# Altium PCB AudRevA.PcbDoc
Units mil, origin at the board's own origin, x right, y up, seen from the top; angles counter-clockwise.
Board outline 2370 x 1710 mil, 2 copper layers (Top Layer, Bottom Layer); 133 components, 62 nets, 319 pads, 116 vias.
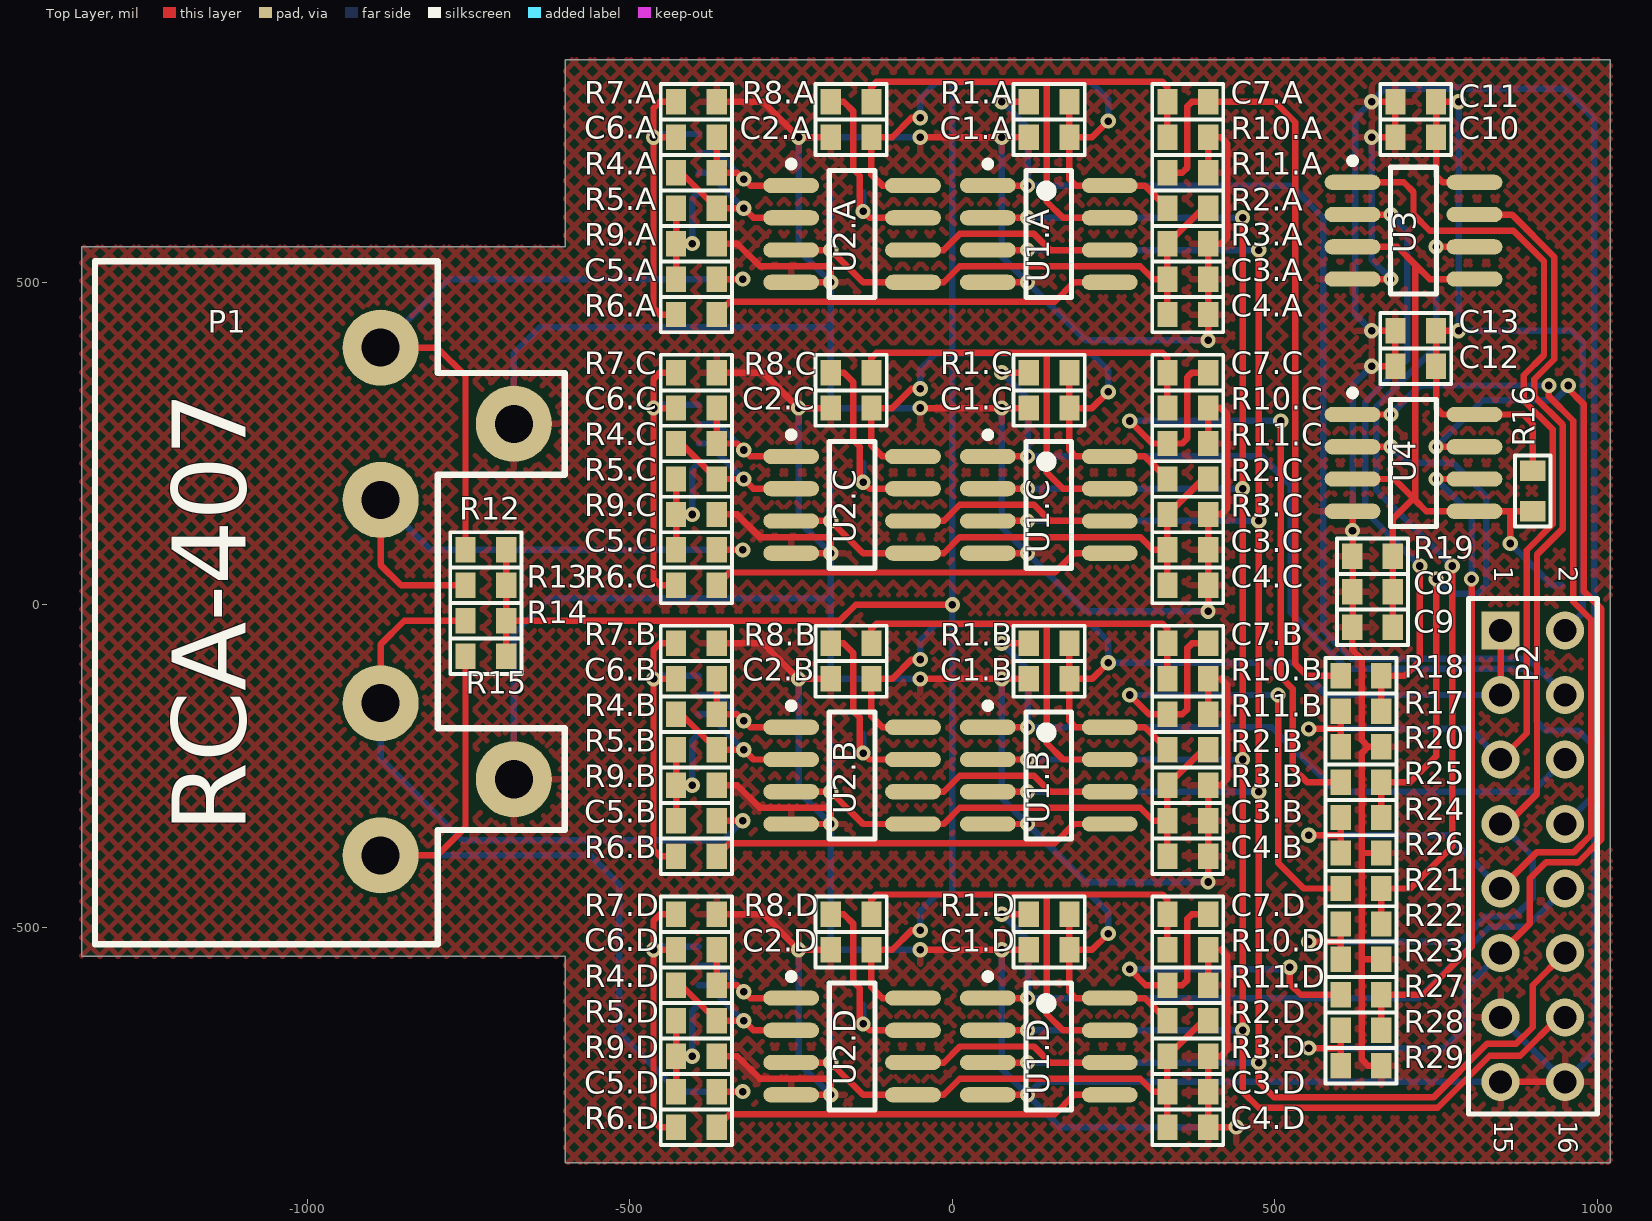
[diagram p0: Top Layer view]
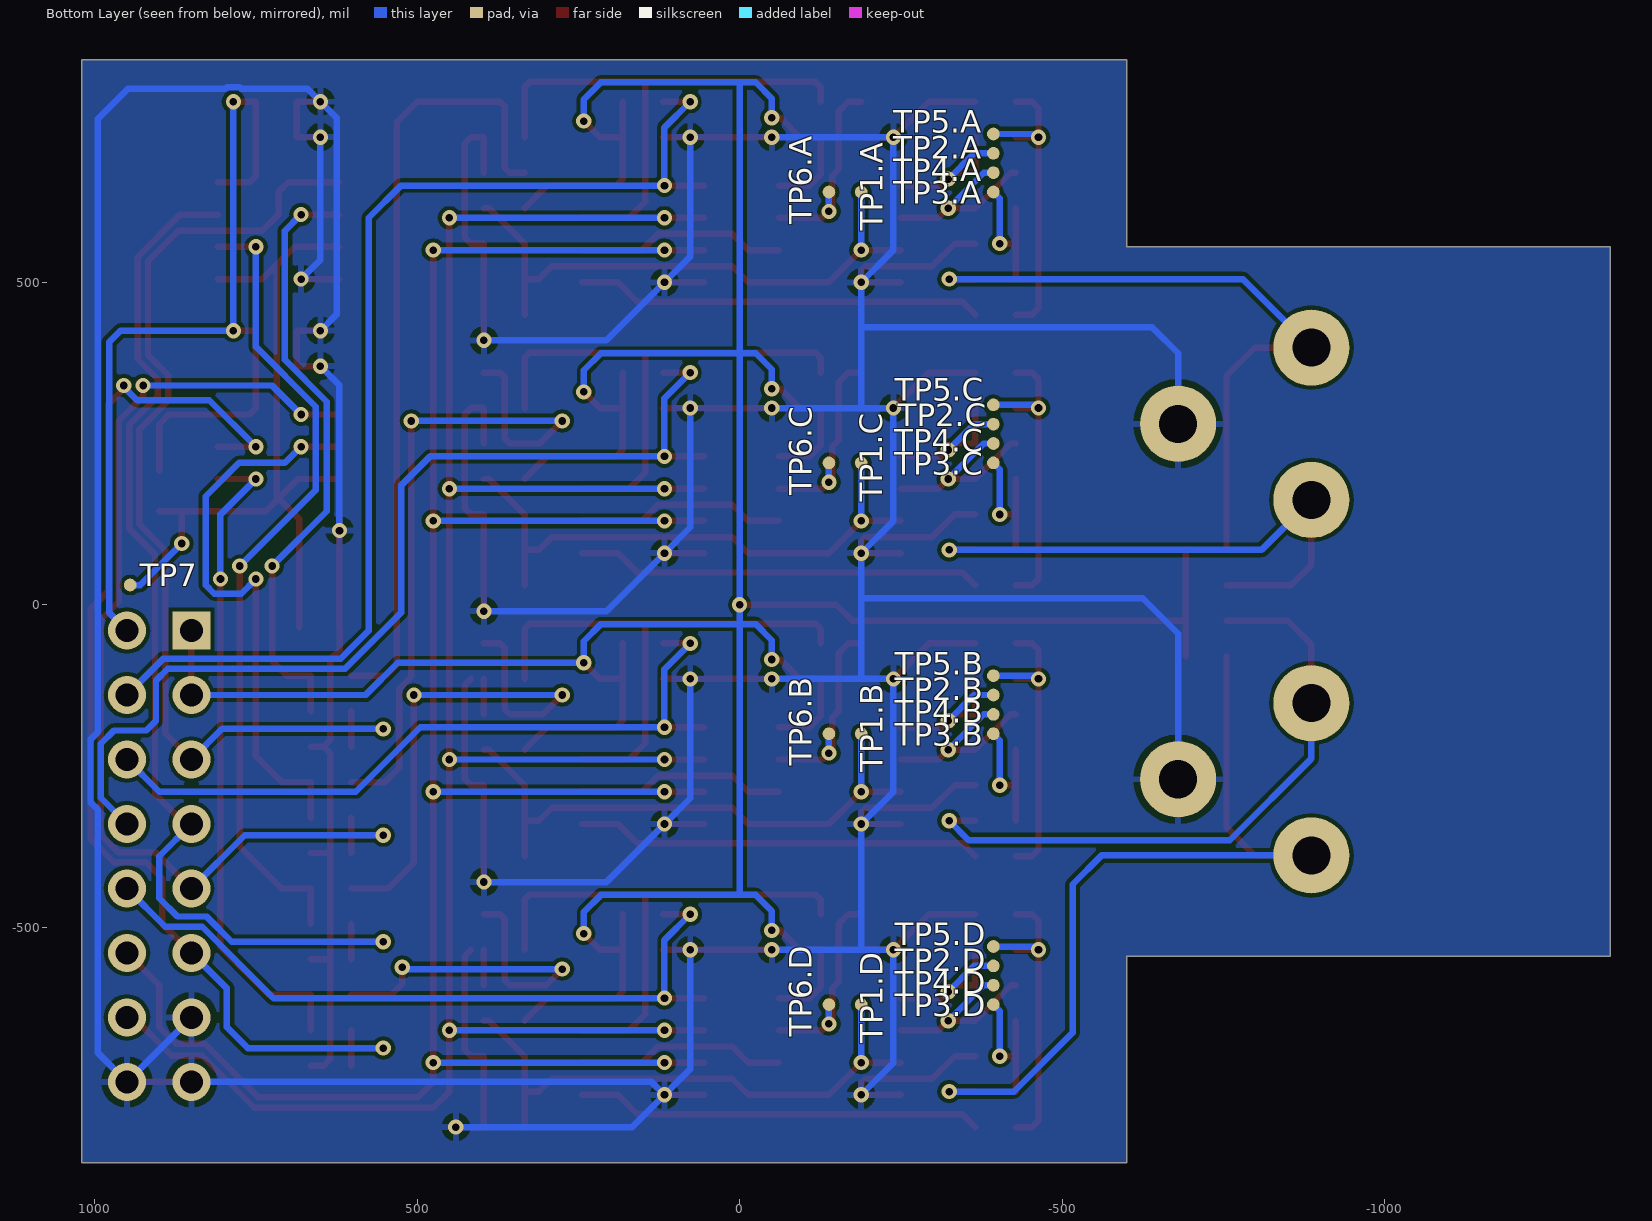
[diagram p1: Bottom Layer view, seen from below]

## Layer stack, top to bottom
Top Solder: solder mask 0.4, Solder Resist, Dk 3.5
Top Layer: signal copper 1.4
Dielectric 1: dielectric 12.6, FR-4, Dk 4.8
Bottom Layer: signal copper 1.4
Bottom Solder: solder mask 0.4, Solder Resist, Dk 3.5

## Board outline
-1350,-545 -1350,555 -600,555 -600,845 1020,845 1020,-865 -600,-865 -600,-545

## Design rules (kind name [scope] priority, off if disabled: settings)
Clearance [All] p1: gap=6 ignorepadtopadclearanceinfootprint=FALSE except(0: Arc-Hole Track-Hole SMDPad-Hole THPad-Hole Via-Hole Fill-Hole Poly-Hole Region-Hole Text-Hole)
ComponentClearance ComponentClearance_1 [InComponent('X1') vs InComponent('X2')] p1: gap=0 collisioncheckmode=3 verticalgap=0 showdistances=FALSE
ComponentClearance [All] p2: gap=10 collisioncheckmode=3 verticalgap=10 showdistances=FALSE
DiffPairsRouting [All] p1: maxlimit=10 minlimit=3.94 mostfreqgap=10 toplayer_minwidth=3.94 toplayer_maxwidth=15 toplayer_prefwidth=15 bottomlayer_minwidth=3.94 bottomlayer_maxwidth=15 bottomlayer_prefwidth=15 maxuncoupledlength=500
Height Height_1 [InComponent('P1')] p1: minheight=0 maxheight=10000 prefheight=500
Height [All] p2: minheight=0 maxheight=1000 prefheight=500
HoleSize [All] p1: absolutevalues=TRUE maxlimit=137.8 minlimit=7.87 maxpercent=80.000 minpercent=20.000
MatchedLengths [(InNetClass('UART1') OR InNetClass('UART2'))] p1: tolerance=19.68 checknetsindiffpair=FALSE checkdiffpairvsdiffpair=TRUE checkxsignals=TRUE checkothers=TRUE
MinimumSolderMaskSliver [All] p1: minsoldermaskwidth=1.77
PasteMaskExpansion [All] p1: expansion=3.94
PolygonConnect PolygonConnect_2 [All vs OnLayer('VCC')] p1: connectstyle=Direct reliefconductorwidth=10 reliefentries=4 polygonreliefangle="90 Angle" airgapwidth=10
PolygonConnect PolygonConnect_1 [All] p2: connectstyle=Relief reliefconductorwidth=10 reliefentries=4 polygonreliefangle="90 Angle" airgapwidth=10
PolygonConnect [All vs OnLayer('GND')] p3: connectstyle=Direct reliefconductorwidth=10 reliefentries=4 polygonreliefangle="90 Angle" airgapwidth=10
RoomDefinition ChD [InComponentClass('ChD')] p1: confinementstyle=ConfineIn formatcopy=TRUE lockcomponents=FALSE outline -568.5,-845 561.5,-845 561.5,-425 -568.5,-425
RoomDefinition ChC [InComponentClass('ChC')] p2: confinementstyle=ConfineIn formatcopy=TRUE lockcomponents=FALSE outline -568.5,-5 561.5,-5 561.5,415 -568.5,415
RoomDefinition ChB [InComponentClass('ChB')] p3: confinementstyle=ConfineIn formatcopy=TRUE lockcomponents=FALSE outline -568.5,-425 561.5,-425 561.5,-5 -568.5,-5
RoomDefinition ChA [InComponentClass('ChA')] p4: confinementstyle=ConfineIn formatcopy=TRUE lockcomponents=FALSE outline -568.5,415 561.5,415 561.5,835 -568.5,835
RoutingTopology [All] p1: topology=Daisy_Simple
RoutingVias [All] p1: holewidth=11.81 width=23.62 viastyle="Through Hole" minholewidth=7.87 minwidth=19.68 maxholewidth=19.68 maxwidth=39.37
SilkToSilkClearance [All] p1: silktosilkclearance=3.94
SilkToSolderMaskClearance [IsPad] p1: minsilkscreentomaskgap=3.94 clearancetoexposedcopper=TRUE
SolderMaskExpansion [All] p1: expansion=4
Width [All] p1: maxlimit=59.06 minlimit=3.94 preferedwidth=10 minimp=50.000000 maximp=50.000000 favimp=50.000000
21 further rules are at their usual default settings.

## Classes and differential pairs
component class ChA: C1.A C2.A C3.A C4.A C5.A C6.A C7.A R1.A R2.A R3.A R4.A R5.A R6.A R7.A R8.A R9.A R10.A R11.A TP1.A TP2.A TP3.A TP4.A TP5.A TP6.A U1.A U2.A
component class ChB: C1.B C2.B C3.B C4.B C5.B C6.B C7.B R1.B R2.B R3.B R4.B R5.B R6.B R7.B R8.B R9.B R10.B R11.B TP1.B TP2.B TP3.B TP4.B TP5.B TP6.B U1.B U2.B
component class ChC: C1.C C2.C C3.C C4.C C5.C C6.C C7.C R1.C R2.C R3.C R4.C R5.C R6.C R7.C R8.C R9.C R10.C R11.C TP1.C TP2.C TP3.C TP4.C TP5.C TP6.C U1.C U2.C
component class ChD: C1.D C2.D C3.D C4.D C5.D C6.D C7.D R1.D R2.D R3.D R4.D R5.D R6.D R7.D R8.D R9.D R10.D R11.D TP1.D TP2.D TP3.D TP4.D TP5.D TP6.D U1.D U2.D
component class Input: C8 C9 C10 C11 C12 C13 P1 P2 R12 R13 R14 R15 R16 R17 R18 R19 R20 R21 R22 R23 R24 R25 R26 R27 R28 R29 TP7 U3 U4
channel class Chanal: ChA ChB ChC ChD

## Components (designator, comment, footprint, x,y, rotation, side; value= is the part's Value field where it differs from the comment)
C1.A "0.1uF" "SMD 0603" 181.5,725 r180 top (schematic designator C1)
C1.B "0.1uF" "SMD 0603" 181.5,-115 r180 top (schematic designator C1)
C1.C "0.1uF" "SMD 0603" 181.5,305 r180 top (schematic designator C1)
C1.D "0.1uF" "SMD 0603" 181.5,-535 r180 top (schematic designator C1)
C2.A "0.1uF" "SMD 0603" -125.51,725 r180 top (schematic designator C2)
C2.B "0.1uF" "SMD 0603" -125.51,-115 r180 top (schematic designator C2)
C2.C "0.1uF" "SMD 0603" -125.51,305 r180 top (schematic designator C2)
C2.D "0.1uF" "SMD 0603" -125.51,-535 r180 top (schematic designator C2)
C3.A "0.1uF" "SMD 0603" 333.5,505 r0 top (schematic designator C3)
C3.B "0.1uF" "SMD 0603" 333.5,-335 r0 top (schematic designator C3)
C3.C "0.1uF" "SMD 0603" 333.5,85 r0 top (schematic designator C3)
C3.D "0.1uF" "SMD 0603" 333.5,-755 r0 top (schematic designator C3)
C4.A "0.01uF" "SMD 0603" 333.5,450 r0 top (schematic designator C4)
C4.B "0.01uF" "SMD 0603" 333.5,-390 r0 top (schematic designator C4)
C4.C "0.01uF" "SMD 0603" 333.5,30 r0 top (schematic designator C4)
C4.D "0.01uF" "SMD 0603" 333.5,-810 r0 top (schematic designator C4)
C5.A "0.1uF" "SMD 0603" -365.51,505 r180 top (schematic designator C5)
C5.B "0.1uF" "SMD 0603" -365.51,-335 r180 top (schematic designator C5)
C5.C "0.1uF" "SMD 0603" -365.51,85 r180 top (schematic designator C5)
C5.D "0.1uF" "SMD 0603" -365.51,-755 r180 top (schematic designator C5)
C6.A "0.1uF" "SMD 0603" -365.51,725 r180 top (schematic designator C6)
C6.B "0.1uF" "SMD 0603" -365.51,-115 r180 top (schematic designator C6)
C6.C "0.1uF" "SMD 0603" -365.51,305 r180 top (schematic designator C6)
C6.D "0.1uF" "SMD 0603" -365.51,-535 r180 top (schematic designator C6)
C7.A "0.1uF" "SMD 0603" 333.5,780 r0 top (schematic designator C7)
C7.B "0.1uF" "SMD 0603" 333.5,-60 r0 top (schematic designator C7)
C7.C "0.1uF" "SMD 0603" 333.5,360 r0 top (schematic designator C7)
C7.D "0.1uF" "SMD 0603" 333.5,-480 r0 top (schematic designator C7)
C8 "0.1uF" "SMD 0603" 682.99,20 r180 top
C9 "0.01uF" "SMD 0603" 682.99,-35 r180 top
C10 "0.1uF" "SMD 0603" 750,725 r180 top
C11 "0.1uF" "SMD 0603" 750,780 r180 top
C12 "0.1uF" "SMD 0603" 750,370 r180 top
C13 "0.1uF" "SMD 0603" 750,425 r180 top
P1 "RCA-407" RCA4 -680,5 r90 top
P2 "Header 8X2" HDR2X8 850,-40 r270 top
R1.A "10k" "SMD 0603" 118.5,780 r0 top (schematic designator R1)
R1.B "10k" "SMD 0603" 118.5,-60 r0 top (schematic designator R1)
R1.C "10k" "SMD 0603" 118.5,360 r0 top (schematic designator R1)
R1.D "10k" "SMD 0603" 118.5,-480 r0 top (schematic designator R1)
R2.A "10k" "SMD 0603" 396.5,615 r180 top (schematic designator R2)
R2.B "10k" "SMD 0603" 396.5,-225 r180 top (schematic designator R2)
R2.C "10k" "SMD 0603" 396.5,195 r180 top (schematic designator R2)
R2.D "10k" "SMD 0603" 396.5,-645 r180 top (schematic designator R2)
R3.A "10k" "SMD 0603" 396.5,560 r180 top (schematic designator R3)
R3.B "10k" "SMD 0603" 396.5,-280 r180 top (schematic designator R3)
R3.C "10k" "SMD 0603" 396.5,140 r180 top (schematic designator R3)
R3.D "10k" "SMD 0603" 396.5,-700 r180 top (schematic designator R3)
R4.A "50k" "SMD 0603" -365.51,670 r180 top (schematic designator R4)
R4.B "50k" "SMD 0603" -365.51,-170 r180 top (schematic designator R4)
R4.C "50k" "SMD 0603" -365.51,250 r180 top (schematic designator R4)
R4.D "50k" "SMD 0603" -365.51,-590 r180 top (schematic designator R4)
R5.A "1k" "SMD 0603" -365.51,615 r180 top (schematic designator R5)
R5.B "1k" "SMD 0603" -365.51,-225 r180 top (schematic designator R5)
R5.C "1k" "SMD 0603" -365.51,195 r180 top (schematic designator R5)
R5.D "1k" "SMD 0603" -365.51,-645 r180 top (schematic designator R5)
R6.A "10k" "SMD 0603" -365.51,450 r180 top (schematic designator R6)
R6.B "10k" "SMD 0603" -365.51,-390 r180 top (schematic designator R6)
R6.C "10k" "SMD 0603" -365.51,30 r180 top (schematic designator R6)
R6.D "10k" "SMD 0603" -365.51,-810 r180 top (schematic designator R6)
R7.A "100k" "SMD 0603" -428.5,780 r0 top (schematic designator R7)
R7.B "100k" "SMD 0603" -428.5,-60 r0 top (schematic designator R7)
R7.C "100k" "SMD 0603" -428.5,360 r0 top (schematic designator R7)
R7.D "100k" "SMD 0603" -428.5,-480 r0 top (schematic designator R7)
R8.A "10k" "SMD 0603" -125.51,780 r180 top (schematic designator R8)
R8.B "10k" "SMD 0603" -125.51,-60 r180 top (schematic designator R8)
R8.C "10k" "SMD 0603" -125.51,360 r180 top (schematic designator R8)
R8.D "10k" "SMD 0603" -125.51,-480 r180 top (schematic designator R8)
R9.A "100k" "SMD 0603" -428.5,560 r0 top (schematic designator R9)
R9.B "100k" "SMD 0603" -428.5,-280 r0 top (schematic designator R9)
R9.C "100k" "SMD 0603" -428.5,140 r0 top (schematic designator R9)
R9.D "100k" "SMD 0603" -428.5,-700 r0 top (schematic designator R9)
R10.A "1M" "SMD 0603" 333.5,725 r0 top (schematic designator R10)
R10.B "1M" "SMD 0603" 333.5,-115 r0 top (schematic designator R10)
R10.C "1M" "SMD 0603" 333.5,305 r0 top (schematic designator R10)
R10.D "1M" "SMD 0603" 333.5,-535 r0 top (schematic designator R10)
R11.A "100k" "SMD 0603" 333.5,670 r0 top (schematic designator R11)
R11.B "100k" "SMD 0603" 333.5,-170 r0 top (schematic designator R11)
R11.C "100k" "SMD 0603" 333.5,250 r0 top (schematic designator R11)
R11.D "100k" "SMD 0603" 333.5,-590 r0 top (schematic designator R11)
R12 "10k" "SMD 0603" -755,85 r0 top
R13 "10k" "SMD 0603" -755,30 r0 top
R14 "10k" "SMD 0603" -755,-25 r0 top
R15 "10k" "SMD 0603" -755,-80 r0 top
R16 "10k" "SMD 0603" 900,145 r90 top
R17 "10k" "SMD 0603" 665,-165 r180 top
R18 "10k" "SMD 0603" 665,-110 r180 top
R19 "10k" "SMD 0603" 620,75 r0 top
R20 "1M" "SMD 0603" 602.01,-220 r0 top
R21 "10k" "SMD 0603" 665,-440 r180 top
R22 "10k" "SMD 0603" 665,-495 r180 top
R23 "1M" "SMD 0603" 602.01,-550 r0 top
R24 "10k" "SMD 0603" 665,-330 r180 top
R25 "10k" "SMD 0603" 665,-275 r180 top
R26 "1M" "SMD 0603" 602.01,-385 r0 top
R27 "10k" "SMD 0603" 665,-605 r180 top
R28 "10k" "SMD 0603" 665,-660 r180 top
R29 "1M" "SMD 0603" 602.01,-715 r0 top
TP1.A "testPoint" TESTPOINT -188.5,640 r90 bottom (schematic designator TP1)
TP1.B "testPoint" TESTPOINT -188.5,-200 r90 bottom (schematic designator TP1)
TP1.C "testPoint" TESTPOINT -188.5,220 r90 bottom (schematic designator TP1)
TP1.D "testPoint" TESTPOINT -188.5,-620 r90 bottom (schematic designator TP1)
TP2.A "testPoint" TESTPOINT -393.5,700 r90 bottom (schematic designator TP2)
TP2.B "testPoint" TESTPOINT -393.5,-140 r90 bottom (schematic designator TP2)
TP2.C "testPoint" TESTPOINT -393.5,280 r90 bottom (schematic designator TP2)
TP2.D "testPoint" TESTPOINT -393.5,-560 r90 bottom (schematic designator TP2)
TP3.A "testPoint" TESTPOINT -393.5,640 r90 bottom (schematic designator TP3)
TP3.B "testPoint" TESTPOINT -393.5,-200 r90 bottom (schematic designator TP3)
TP3.C "testPoint" TESTPOINT -393.5,220 r90 bottom (schematic designator TP3)
TP3.D "testPoint" TESTPOINT -393.5,-620 r90 bottom (schematic designator TP3)
TP4.A "testPoint" TESTPOINT -393.5,670 r90 bottom (schematic designator TP4)
TP4.B "testPoint" TESTPOINT -393.5,-170 r90 bottom (schematic designator TP4)
TP4.C "testPoint" TESTPOINT -393.5,250 r90 bottom (schematic designator TP4)
TP4.D "testPoint" TESTPOINT -393.5,-590 r90 bottom (schematic designator TP4)
TP5.A "testPoint" TESTPOINT -393.5,730 r90 bottom (schematic designator TP5)
TP5.B "testPoint" TESTPOINT -393.5,-110 r90 bottom (schematic designator TP5)
TP5.C "testPoint" TESTPOINT -393.5,310 r90 bottom (schematic designator TP5)
TP5.D "testPoint" TESTPOINT -393.5,-530 r90 bottom (schematic designator TP5)
TP6.A "testPoint" TESTPOINT -138.5,640 r90 bottom (schematic designator TP6)
TP6.B "testPoint" TESTPOINT -138.5,-200 r90 bottom (schematic designator TP6)
TP6.C "testPoint" TESTPOINT -138.5,220 r90 bottom (schematic designator TP6)
TP6.D "testPoint" TESTPOINT -138.5,-620 r90 bottom (schematic designator TP6)
TP7 "testPoint" TESTPOINT 945,30.55 r90 bottom
U1.A "MCP41010-I/SN" SOIC-SN8_N 149.5,575 r0 top (schematic designator U1)
U1.B "MCP41010-I/SN" SOIC-SN8_N 149.5,-265 r0 top (schematic designator U1)
U1.C "MCP41010-I/SN" SOIC-SN8_N 149.5,155 r0 top (schematic designator U1)
U1.D "MCP41010-I/SN" SOIC-SN8_N 149.5,-685 r0 top (schematic designator U1)
U2.A "LM358D" 751-02_N -155.51,575 r0 top (schematic designator U2)
U2.B "LM358D" 751-02_N -155.51,-265 r0 top (schematic designator U2)
U2.C "LM358D" 751-02_N -155.51,155 r0 top (schematic designator U2)
U2.D "LM358D" 751-02_N -155.51,-685 r0 top (schematic designator U2)
U3 "LM358D" 751-02_N 715,580 r0 top
U4 "LM358D" 751-02_N 715,220 r0 top

## Footprints (in the part's own frame and the unit in brackets; to place one, negate y for a bottom-side part, rotate by r counter-clockwise, add the part's x,y. Pads: shape width x height; smd on the part's side, far side on the other; paste and mask are expansions set on the pad)
751-02_N [mm] "SOIC, 8-Leads, Body 4.9x3.9mm, Pitch 1.27mm, IPC Medium Density"
  oval 2.2x0.6 smd: 1(-2.4,1.905) 2(-2.4,0.635) 3(-2.4,-0.635) 4(-2.4,-1.905) 5(2.4,-1.905) 6(2.4,-0.635) 7(2.4,0.635) 8(2.4,1.905)
  silkscreen extent -2.52,-2.5 0.9,2.88, body extent -1.95,-2.45 1.95,2.45, height 1.75
HDR2X8 [mm] "Connector; Header; 8x2 Position"
  rect 1.5x1.5 hole 0.9: 1(0,0)
  round 1.5 hole 0.9: 2(0,2.54) 3(2.54,0) 4(2.54,2.54) 5(5.08,0) 6(5.08,2.54) 7(7.62,0) 8(7.62,2.54) 9(10.16,0) 10(10.16,2.54) 11(12.7,0) 12(12.7,2.54) 13(15.24,0) 14(15.24,2.54) 15(17.78,0) 16(17.78,2.54)
  silkscreen extent -1.27,-1.27 19.05,3.81
RCA4 [mm]
  round 3 hole 1.5: 1(10,5.25) 2(4,5.25) 3(-4,5.25) 4(-10,5.25) 5(7,0) 6(-7,0)
  silkscreen extent -13.5,-2 13.4,16.5, body extent -13.77,-0.6 13.72,24.3, height 27
"SMD 0603" [mm]
  rect 0.8x1 smd: 1(0,0) 2(1.6,0)
  silkscreen extent -0.6,-0.7 2.2,0.7, body extent -0.03,-0.45 1.63,0.45, height 0.46
SOIC-SN8_N [mm] "SOIC, 8-Leads, Body 4.9x3.8mm, Pitch 1.27mm, IPC Medium Density"
  oval 2.2x0.6 smd: 1(-2.4,1.905) 2(-2.4,0.635) 3(-2.4,-0.635) 4(-2.4,-1.905) 5(2.4,-1.905) 6(2.4,-0.635) 7(2.4,0.635) 8(2.4,1.905)
  silkscreen extent -2.52,-2.5 0.9,2.88, body extent -2,-2.5 2,2.5, height 1.75
TESTPOINT [mm] "testpoint"
  round 0.5 smd paste+0 mask+0: 0(0,0)

## Part data
C1.A C1.B C1.C C1.D C2.A C2.B C2.C C2.D C3.A C3.B C3.C C3.D C4.A C4.B C4.C C4.D C5.A C5.B C5.C C5.D C6.A C6.B C6.C C6.D C7.A C7.B C7.C C7.D C8 C9 C10 C11 C12 C13: library part Capasitor
P1: "RCA 2x2"
P2: "Header, 8-Pin, Dual row", LatestRevisionDate=17-Jul-2002, LatestRevisionNote="Re-released for DXP Platform.", Publisher="Altium Limited"
R1.A R1.B R1.C R1.D R2.A R2.B R2.C R2.D R3.A R3.B R3.C R3.D R4.A R4.B R4.C R4.D R5.A R5.B R5.C R5.D R6.A R6.B R6.C R6.D R7.A R7.B R7.C R7.D R8.A R8.B R8.C R8.D R9.A R9.B R9.C R9.D R10.A R10.B R10.C R10.D R11.A R11.B R11.C R11.D R12 R13 R14 R15 R16 R17 R18 R19 R20 R21 R22 R23 R24 R25 R26 R27 R28 R29: library part Resistor
TP1.A TP1.B TP1.C TP1.D TP2.A TP2.B TP2.C TP2.D TP3.A TP3.B TP3.C TP3.D TP4.A TP4.B TP4.C TP4.D TP5.A TP5.B TP5.C TP5.D TP6.A TP6.B TP6.C TP6.D TP7: library part TestPoint
U1.A U1.B U1.C U1.D: "Single/Dual Digital Potentiometer with SPI Interface, 8-Pin SOIC 150mil, Industrial Temperature", Manufacturer=Microchip, Supplier Part Number 1=MCP41010-I/SN-ND, Code_IPC=SOIC127P600-8, Code_JEDEC=MS-012, ComponentLink1Description="Manufacturer URL", ComponentLink1URL=http://www.microchip.com/, ComponentLink2Description=Datasheet, ComponentLink2URL=http://ww1.microchip.com/downloads/en/DeviceDoc/11195c.pdf, ComponentLink3Description="Package Specification", ComponentLink3URL=http://www.microchip.com/stellent/groups/techpub_sg/documents/packagingspec/en012702.pdf, DatasheetVersion=Jul-2003, Mounting Technology="Surface Mount", PackageDescription="8-Lead Plastic Small Outline (SN) - Narrow, 3.90mm Body [SOIC]", PackageReference=SOIC-SN8, PackageVersion="revBB, Aug-2009", PartNumber=MCP41010-I/SN, Supplier 1=Digi-Key, Supplier 2=Farnell, Supplier 3=Newark, Supplier 4=Mouser, Supplier Part Number 2=9758607, Supplier Part Number 3=61K2949, Supplier Part Number 4=579-MCP41010-I/SN
U2.A U2.B U2.C U2.D U3 U4: "Dual Low-Power Operational Amplifier", Code_IPC=SOIC127P600-8, Code_JEDEC=MS-012-AA, ComponentLink1Description="Manufacturer Link", ComponentLink1URL=http://www.onsemi.com/site/products/parametrics/0,4446,251,00.html, ComponentLink2Description=Datasheet, ComponentLink2URL=http://www.onsemi.com/pub/Collateral/LM358-D.PDF, DatasheetVersion=1988, LatestRevisionDate=13-Apr-2006, LatestRevisionNote="IPC-7351 Footprint Added.", PackageDescription="8-Pin Small Outline Integrated Circuit 1.27 mm Pitch", PackageReference=751-02, Published=17-Jul-2002, Publisher="Altium Limited"

## Via types
v1: diameter 23.62, hole 11.81, Top Layer to Bottom Layer, tented both sides, 116 vias

## Nets (pads, with @x,y where several pads share a name; then routed paths per layer and width w, separated by ;. In a path a pad name is that pad's centre, name@x,y a point inside that pad or via, vN(x,y) a via of type N, cw(c..) or ccw(c..) an arc to the next point about the centre after c; other vN are vias at no path point)
\CS_ChA: P2.4 R1.A.1 U1.A.1 | length 1785.7
  Top Layer w10: U1.A.1 v1(116.5,650) ; v1(76.5,780) R1.A.1
  Bottom Layer w10: v1(76.5,780) 116.5,740 v1(116.5,650) 525,650 575,600 575,-40 618.47,-83.47 893.47,-83.47 P2.4
\CS_ChB: P2.6 R1.B.1 U1.B.1 | length 1145.7
  Top Layer w10: U1.B.1 v1(116.5,-190) ; v1(76.5,-60) R1.B.1
  Bottom Layer w10: v1(76.5,-60) 116.5,-100 v1(116.5,-190) 495,-190 595,-290 900,-290 P2.6
\CS_ChC: P2.8 R1.C.1 U1.C.1 | length 1602.2
  Top Layer w10: U1.C.1 v1(116.5,230) ; v1(76.5,360) R1.C.1
  Bottom Layer w10: v1(76.5,360) 116.5,320 v1(116.5,230) 480,230 525,185 525,-12.63 611.84,-99.47 886.84,-99.47 905,-117.63 905,-180 920,-195 970,-195 990.53,-215.53 990.53,-299.47 P2.8
\CS_ChD: P2.10 R1.D.1 U1.D.1 | length 1154
  Top Layer w10: U1.D.1 v1(116.5,-610) ; v1(76.5,-480) R1.D.1
  Bottom Layer w10: v1(76.5,-480) 116.5,-520 v1(116.5,-610) 722.69,-610 833.21,-499.47 890.53,-499.47 P2.10
A0_ChA: R6.A.1 U1.A.5 | length 630.2
  Top Layer w10: R6.A.1 -345.51,470 158.5,470 188.5,500 U1.A.5
A0_ChB: R6.B.1 U1.B.5 | length 630.2
  Top Layer w10: R6.B.1 -345.51,-370 158.5,-370 188.5,-340 U1.B.5
A0_ChC: R6.C.1 U1.C.5 | length 630.2
  Top Layer w10: R6.C.1 -345.51,50 158.5,50 188.5,80 U1.C.5
A0_ChD: R6.D.1 U1.D.5 | length 630.2
  Top Layer w10: R6.D.1 -345.51,-790 158.5,-790 188.5,-760 U1.D.5
B0_ChA: C7.A.1 R8.A.1 R10.A.1 U1.A.7 | length 859.2
  Top Layer w10: R8.A.1 -125.51,802.99 -117.82,810.69 325.81,810.69 333.5,802.99 C7.A.1 R10.A.1 ; 146.5,810 146.5,625 171.5,600 U1.A.7
B0_ChB: C7.B.1 R8.B.1 R10.B.1 U1.B.7 | length 859.2
  Top Layer w10: R8.B.1 -125.51,-37.01 -117.82,-29.31 325.81,-29.31 333.5,-37.01 C7.B.1 R10.B.1 ; 146.5,-30 146.5,-215 171.5,-240 U1.B.7
B0_ChC: C7.C.1 R8.C.1 R10.C.1 U1.C.7 | length 859.2
  Top Layer w10: R8.C.1 -125.51,382.99 -117.82,390.69 325.81,390.69 333.5,382.99 C7.C.1 R10.C.1 ; 146.5,390 146.5,205 171.5,180 U1.C.7
B0_ChD: C7.D.1 R8.D.1 R10.D.1 U1.D.7 | length 859.2
  Top Layer w10: R8.D.1 -125.51,-457.01 -117.82,-449.31 325.81,-449.31 333.5,-457.01 C7.D.1 R10.D.1 ; 146.5,-450 146.5,-635 171.5,-660 U1.D.7
ChA: C5.A.1 P1.1 R12.1 | length 1066
  Top Layer w10: P1.1 -798.7,398.7 -755,355 R12.1 ; C5.A.1 v1(-325,505)
  Bottom Layer w10: P1.1 -780.39,505 v1(-325,505)
ChB: C5.B.1 P1.3 R14.1 | length 990.6
  Top Layer w10: P1.3 -886.69,-61.69 -850,-25 R14.1 ; C5.B.1 v1(-325,-335)
  Bottom Layer w10: P1.3 -886.69,-238.31 -760,-365 -355,-365 v1(-325,-335)
ChC: C5.C.1 P1.2 R13.1 | length 879.9
  Top Layer w10: P1.2 -886.69,61.69 -855,30 R13.1 ; C5.C.1 v1(-325,85)
  Bottom Layer w10: P1.2 -809.21,85 v1(-325,85)
ChD: C5.D.1 P1.4 R15.1 | length 1303.5
  Top Layer w10: P1.4 -798.7,-388.7 -755,-345 R15.1 ; C5.D.1 v1(-325,-755)
  Bottom Layer w10: P1.4 -561.3,-388.7 -516.58,-433.43 -516.58,-663.43 -425,-755 v1(-325,-755)
GND: C1.A.2 C1.B.2 C1.C.2 C1.D.2 C2.A.2 C2.B.2 C2.C.2 C2.D.2 C3.A.2 C3.B.2 C3.C.2 C3.D.2 C4.A.2 C4.B.2 C4.C.2 C4.D.2 C8.2 C9.2 C10.2 C11.2 C12.2 C13.2 P1.5 P1.6 P2.13 P2.15 P2.16 R3.A.1 R3.B.1 R3.C.1 R3.D.1 R7.A.2 R7.B.2 R7.C.2 R7.D.2 R9.A.2 R9.B.2 R9.C.2 R9.D.2 R10.A.2 R10.B.2 R10.C.2 R10.D.2 R11.A.2 R11.B.2 R11.C.2 R11.D.2 R19.1 R20.2 R23.2 R26.2 R29.2 U1.A.4 U1.B.4 U1.C.4 U1.D.4 U2.A.4 U2.B.4 U2.C.4 U2.D.4 U3.4 U4.4 | length 15439.7
  Top Layer w10: R9.D.2 -333.5,-700 -298.5,-735 -195,-735 -188.5,-741.5 v1(-188.5,-760) U2.D.4 ; R7.D.2 -293.5,-480 v1(-238.5,-535) C2.D.2 ; R9.B.2 -333.5,-280 -298.5,-315 -195,-315 -188.5,-321.5 v1(-188.5,-340) U2.B.4 ; R7.B.2 -293.5,-60 v1(-238.5,-115) C2.B.2 ; R9.C.2 -333.5,140 -298.5,105 -195,105 -188.5,98.5 v1(-188.5,80) U2.C.4 ; R7.C.2 -293.5,360 v1(-238.5,305) C2.C.2 ; R9.A.2 -333.5,560 -298.5,525 -195,525 -188.5,518.5 v1(-188.5,500) U2.A.4 ; R7.A.2 -293.5,780 v1(-238.5,725) C2.A.2 ; v1(-50,-535) v1(76.5,-535) C1.D.2 ; v1(-50,-115) v1(76.5,-115) C1.B.2 ; v1(-50,305) v1(76.5,305) C1.C.2 ; v1(-50,725) v1(76.5,725) C1.A.2 ; U1.D.4 v1(116.5,-760) ; U1.B.4 v1(116.5,-340) ; U1.C.4 v1(116.5,80) ; U1.A.4 v1(116.5,500) ; R11.D.2 R10.D.2 ; v1(396.5,-430) C4.B.2 C3.B.2 R3.B.1 416.5,-280 426.5,-270 426.5,-125 416.5,-115 ; R11.B.2 R10.B.2 ; v1(396.5,-10) C4.C.2 C3.C.2 R3.C.1 416.5,140 426.5,150 426.5,295 415.75,305.75 397.24,305.75 R10.C.2 R11.C.2 ; v1(396.5,410) C4.A.2 C3.A.2 R3.A.1 416.5,560 426.5,570 426.5,715 416.5,725 R10.A.2 R11.A.2 ; 416.5,-535 426.5,-545 426.5,-690 416.5,-700 R3.D.1 C3.D.2 C4.D.2 v1(440,-810) ; U4.4 v1(620.51,115) 620.51,-34.49 C9.2 620,-70 635,-85 635,-210 645,-220 ; U3.4 v1(680,505) ; v1(650,370) C12.2 C13.2 v1(650,425) ; v1(650,725) C10.2 C11.2 v1(650,780) ; R29.2 645,-715 635,-705 635,-550 ; R23.2 635,-550 ; R26.2 635,-385 ; R20.2 645,-220 ; P2.15 P2.16 ; 635,-550 635,-385 ; 635,-385 635,-230 645,-220
  Bottom Layer w10: P1.6 -680,-45 -625,10 -188.5,10 ; P1.5 -680,390 -640,430 -188.5,430 ; v1(-188.5,-760) -238.5,-710 v1(-238.5,-535) v1(-50,-535) ; -188.5,-533.5 v1(-188.5,-340) -238.5,-290 v1(-238.5,-115) v1(-50,-115) ; -188.5,-113.5 -188.5,10 ; -188.5,308.5 -188.5,430 ; v1(-50,305) v1(-238.5,305) -238.5,130 v1(-188.5,80) -188.5,10 ; v1(-50,725) v1(-238.5,725) -238.5,550 v1(-188.5,500) -188.5,430 ; v1(76.5,-535) 76.5,-720 v1(116.5,-760) ; v1(76.5,-115) 76.5,-300 v1(116.5,-340) 206.5,-430 v1(396.5,-430) ; v1(76.5,305) 76.5,120 v1(116.5,80) 206.5,-10 v1(396.5,-10) ; v1(76.5,725) 76.5,540 v1(116.5,500) 206.5,410 v1(396.5,410) ; v1(440,-810) 166.5,-810 v1(116.5,-760) ; v1(620.51,115) 620.51,340.51 v1(650,370) ; v1(650,425) 625,450 625,755 v1(650,780) 670,800 772.74,800 775.55,802.81 794.45,802.81 797.26,800 948.5,800 995,753.5 995,-197.37 1006.53,-208.9 1006.53,-306.1 995,-317.63 995,-695 P2.16 P2.13 ; v1(650,725) 650,535 v1(680,505) ; P2.15 136.5,-740 v1(116.5,-760)
NetC5.A_2: C5.A.2 R5.A.2 R9.A.1 TP3.A.0 | length 219.1
  Top Layer w10: C5.A.2 R9.A.1 ; R5.A.2 R9.A.1 ; v1(-403.5,560) R9.A.1
  Bottom Layer w10: v1(-403.5,560) -403.5,630 TP3.A.0
NetC5.B_2: C5.B.2 R5.B.2 R9.B.1 TP3.B.0 | length 219.1
  Top Layer w10: C5.B.2 R9.B.1 ; R5.B.2 R9.B.1 ; v1(-403.5,-280) R9.B.1
  Bottom Layer w10: v1(-403.5,-280) -403.5,-210 TP3.B.0
NetC5.C_2: C5.C.2 R5.C.2 R9.C.1 TP3.C.0 | length 219.1
  Top Layer w10: C5.C.2 R9.C.1 ; R5.C.2 R9.C.1 ; v1(-403.5,140) R9.C.1
  Bottom Layer w10: v1(-403.5,140) -403.5,210 TP3.C.0
NetC5.D_2: C5.D.2 R5.D.2 R9.D.1 TP3.D.0 | length 219.1
  Top Layer w10: C5.D.2 R9.D.1 ; R5.D.2 R9.D.1 ; v1(-403.5,-700) R9.D.1
  Bottom Layer w10: v1(-403.5,-700) -403.5,-630 TP3.D.0
NetC6.A_1: C6.A.1 R4.A.1 TP2.A.0 U2.A.1 | length 265.4
  Top Layer w10: C6.A.1 R4.A.1 -333.5,670 v1(-323.5,660) -313.5,650 U2.A.1
  Bottom Layer w10: TP2.A.0 -363.5,700 v1(-323.5,660)
NetC6.A_2: C6.A.2 R6.A.2 R7.A.1 TP5.A.0 | length 495.4
  Top Layer w10: R6.A.2 -453.5,450 -463.5,460 v1(-463.5,725) ; C6.A.2 v1(-463.5,725) ; R7.A.1 -453.5,780 -463.5,770 v1(-463.5,725)
  Bottom Layer w10: v1(-463.5,725) -458.5,730 TP5.A.0
NetC6.B_1: C6.B.1 R4.B.1 TP2.B.0 U2.B.1 | length 265.4
  Top Layer w10: C6.B.1 R4.B.1 -333.5,-170 v1(-323.5,-180) -313.5,-190 U2.B.1
  Bottom Layer w10: TP2.B.0 -363.5,-140 v1(-323.5,-180)
NetC6.B_2: C6.B.2 R6.B.2 R7.B.1 TP5.B.0 | length 495.4
  Top Layer w10: R6.B.2 -453.5,-390 -463.5,-380 v1(-463.5,-115) ; C6.B.2 v1(-463.5,-115) ; R7.B.1 -453.5,-60 -463.5,-70 v1(-463.5,-115)
  Bottom Layer w10: v1(-463.5,-115) -458.5,-110 TP5.B.0
NetC6.C_1: C6.C.1 R4.C.1 TP2.C.0 U2.C.1 | length 265.4
  Top Layer w10: C6.C.1 R4.C.1 -333.5,250 v1(-323.5,240) -313.5,230 U2.C.1
  Bottom Layer w10: TP2.C.0 -363.5,280 v1(-323.5,240)
NetC6.C_2: C6.C.2 R6.C.2 R7.C.1 TP5.C.0 | length 495.4
  Top Layer w10: R6.C.2 -453.5,30 -463.5,40 v1(-463.5,305) ; C6.C.2 v1(-463.5,305) ; R7.C.1 -453.5,360 -463.5,350 v1(-463.5,305)
  Bottom Layer w10: v1(-463.5,305) -458.5,310 TP5.C.0
NetC6.D_1: C6.D.1 R4.D.1 TP2.D.0 U2.D.1 | length 265.4
  Top Layer w10: C6.D.1 R4.D.1 -333.5,-590 v1(-323.5,-600) -313.5,-610 U2.D.1
  Bottom Layer w10: TP2.D.0 -363.5,-560 v1(-323.5,-600)
NetC6.D_2: C6.D.2 R6.D.2 R7.D.1 TP5.D.0 | length 495.4
  Top Layer w10: R6.D.2 -453.5,-810 -463.5,-800 v1(-463.5,-535) ; C6.D.2 v1(-463.5,-535) ; R7.D.1 -453.5,-480 -463.5,-490 v1(-463.5,-535)
  Bottom Layer w10: v1(-463.5,-535) -458.5,-530 TP5.D.0
NetR4.A_2: R4.A.2 R5.A.1 TP4.A.0 U2.A.2 | length 300.3
  Top Layer w10: R4.A.2 -420.51,670 R5.A.1 v1(-323.5,615) -308.5,600 U2.A.2
  Bottom Layer w10: TP4.A.0 -378.5,670 v1(-323.5,615)
NetR4.B_2: R4.B.2 R5.B.1 TP4.B.0 U2.B.2 | length 300.3
  Top Layer w10: R4.B.2 -420.51,-170 R5.B.1 v1(-323.5,-225) -308.5,-240 U2.B.2
  Bottom Layer w10: TP4.B.0 -378.5,-170 v1(-323.5,-225)
NetR4.C_2: R4.C.2 R5.C.1 TP4.C.0 U2.C.2 | length 300.3
  Top Layer w10: R4.C.2 -420.51,250 R5.C.1 v1(-323.5,195) -308.5,180 U2.C.2
  Bottom Layer w10: TP4.C.0 -378.5,250 v1(-323.5,195)
NetR4.D_2: R4.D.2 R5.D.1 TP4.D.0 U2.D.2 | length 300.3
  Top Layer w10: R4.D.2 -420.51,-590 R5.D.1 v1(-323.5,-645) -308.5,-660 U2.D.2
  Bottom Layer w10: TP4.D.0 -378.5,-590 v1(-323.5,-645)
NetR8.A_2: R8.A.2 TP6.A.0 U2.A.7 | length 314
  Top Layer w10: R8.A.2 -168.5,780 -153.5,765 -153.5,675.25 -143.5,665.25 -143.5,615 v1(-138.5,610) -128.5,600 U2.A.7
  Bottom Layer w10: v1(-138.5,610) TP6.A.0
NetR8.B_2: R8.B.2 TP6.B.0 U2.B.7 | length 314
  Top Layer w10: R8.B.2 -168.5,-60 -153.5,-75 -153.5,-164.75 -143.5,-174.75 -143.5,-225 v1(-138.5,-230) -128.5,-240 U2.B.7
  Bottom Layer w10: v1(-138.5,-230) TP6.B.0
NetR8.C_2: R8.C.2 TP6.C.0 U2.C.7 | length 314
  Top Layer w10: R8.C.2 -168.5,360 -153.5,345 -153.5,255.25 -143.5,245.25 -143.5,195 v1(-138.5,190) -128.5,180 U2.C.7
  Bottom Layer w10: v1(-138.5,190) TP6.C.0
NetR8.D_2: R8.D.2 TP6.D.0 U2.D.7 | length 314
  Top Layer w10: R8.D.2 -168.5,-480 -153.5,-495 -153.5,-584.75 -143.5,-594.75 -143.5,-645 v1(-138.5,-650) -128.5,-660 U2.D.7
  Bottom Layer w10: v1(-138.5,-650) TP6.D.0
NetR17_1: R17.1 R18.1 U3.2 | length 948.4
  Top Layer w10: U3.2 v1(680,605) ; R17.1 R18.1 701.81,-110 725,-86.81 v1(725,60)
  Bottom Layer w10: v1(680,605) 705,580 705,380 640,315 640,145 v1(725,60)
NetR21_1: R21.1 R22.1 U3.6 | length 1268.7
  Top Layer w10: R22.1 R21.1 710,-440 775,-375 v1(775,60) ; v1(750,555) U3.6
  Bottom Layer w10: v1(750,555) 750,400 657.19,307.19 657.19,177.81 v1(775,60)
NetR24_1: R24.1 R25.1 U4.2 | length 901.2
  Top Layer w10: U4.2 v1(680,245) ; R24.1 R25.1 710,-275 750,-235 v1(750,40)
  Bottom Layer w10: v1(680,245) 705,220 776.11,220 827.81,168.3 827.81,30.55 814.45,17.19 772.81,17.19 v1(750,40)
NetR27_1: R27.1 R28.1 U4.6 | length 1033.3
  Top Layer w10: R28.1 R27.1 730,-605 805,-530 v1(805,40) ; v1(750,195) U4.6
  Bottom Layer w10: v1(750,195) 805,140 v1(805,40)
OutA: C7.A.2 R11.A.1 R18.2 | length 1230.4
  Top Layer w10: R11.A.1 356.5,670 364.5,678 364.5,773 371.5,780 C7.A.2 500,780 531.81,748.19 531.81,-91.81 550,-110 R18.2
OutB: C7.B.2 R11.B.1 R21.2 | length 838.7
  Top Layer w10: v1(275,-140) 305,-170 R11.B.1 356.5,-170 364.5,-162 364.5,-67 371.5,-60 C7.B.2 ; v1(505,-140) 505,-400 545,-440 R21.2
  Bottom Layer w10: v1(275,-140) v1(505,-140)
OutC: C7.C.2 R11.C.1 R25.2 | length 1100.2
  Top Layer w10: v1(275,285) 310,250 R11.C.1 356.5,250 364.5,258 364.5,353 371.5,360 C7.C.2 ; v1(509,285) 509,-111.74 527.81,-130.55 527.81,-252.81 550,-275 R25.2
  Bottom Layer w10: v1(275,285) v1(509,285)
OutD: C7.D.2 R11.D.1 R27.2 | length 594.4
  Top Layer w10: v1(275,-565) 300,-590 R11.D.1 356.5,-590 364.5,-582 364.5,-487 371.5,-480 C7.D.2 ; v1(523,-562) 523,-588 540,-605 R27.2
  Bottom Layer w10: v1(275,-565) 520,-565 v1(523,-562)
ResA: P2.5 R17.2 R20.1 U3.1 | length 1627.1
  Top Layer w10: v1(552.5,-192.5) 602.01,-192.5 ; R20.1 602.01,-192.5 ; R17.2 602.01,-192.5 ; U3.1 700,655 715,640 715,605 740,580 870,580 917.37,532.63 917.37,387.26 886.19,356.08 886.19,316.44 930.69,271.94 930.69,124.7 890.53,84.54 890.53,-199.47 P2.5
  Bottom Layer w10: v1(552.5,-192.5) 802.5,-192.5 P2.5
ResB: P2.7 R22.2 R23.1 U3.7 | length 1723.3
  Top Layer w10: v1(552.5,-522.5) 602.01,-522.5 ; R23.1 602.01,-522.5 ; R22.2 602.01,-522.5 ; U3.7 867.63,605 933.37,539.25 933.37,380.63 902.19,349.45 902.19,323.07 946.69,278.57 946.69,118.07 906.53,77.91 906.53,-293.47 860,-340 P2.7
  Bottom Layer w10: v1(552.5,-522.5) 787.56,-522.5 826.59,-483.47 871.53,-483.47 900,-455 900,-390 P2.7
ResC: P2.9 R24.2 R26.1 U4.1 | length 1658.2
  Top Layer w10: v1(552.5,-357.5) 602.01,-357.5 ; R26.1 602.01,-357.5 ; R24.2 602.01,-357.5 ; U4.1 v1(680,295) ; P2.9 906.53,-383.47 963.84,-383.47 990.53,-356.79 990.53,-23.21 962.69,4.63 962.69,285.2 925,322.88 v1(925,340)
  Bottom Layer w10: v1(552.5,-357.5) 767.5,-357.5 P2.9 ; v1(680,295) 725,340 v1(925,340)
ResD: P2.11 R28.2 R29.1 U4.7 | length 1799.3
  Top Layer w10: v1(552.5,-687.5) 602.01,-687.5 ; R29.1 602.01,-687.5 ; R28.2 602.01,-687.5 ; v1(750,245) U4.7 ; P2.11 895,-495 895,-425 920.53,-399.47 966.79,-399.47 967.31,-400 967.84,-399.47 970.47,-399.47 1006.53,-363.41 1006.53,-6.59 978.69,21.26 978.69,311.31 955,335 v1(955,340)
  Bottom Layer w10: v1(552.5,-687.5) 762.5,-687.5 795,-655 795,-595 P2.11 ; v1(750,245) 822.19,317.19 934.45,317.19 955,337.74 v1(955,340)
SCK: P2.14 U1.A.2 U1.B.2 U1.C.2 U1.D.2 | length 3503.3
  Top Layer w10: U1.D.2 v1(116.5,-660) ; U1.B.2 v1(116.5,-240) ; U1.C.2 v1(116.5,180) ; U1.A.2 v1(116.5,600) ; v1(450,600) v1(450,180) v1(450,-240) v1(450,-660) 450,-755 475,-780 752.69,-780 833.21,-699.47 880.53,-699.47 940,-640 P2.14
  Bottom Layer w10: v1(116.5,-660) v1(450,-660) ; v1(116.5,-240) v1(450,-240) ; v1(116.5,180) v1(450,180) ; v1(116.5,600) v1(450,600)
SI: P2.12 U1.A.3 U1.B.3 U1.C.3 U1.D.3 | length 3585.8
  Top Layer w10: U1.D.3 v1(116.5,-710) ; U1.B.3 v1(116.5,-290) ; U1.C.3 v1(116.5,130) ; U1.A.3 v1(116.5,550) ; v1(475,550) v1(475,130) v1(475,-290) v1(475,-710) 475,-740 499,-764 746.06,-764 829.53,-680.53 874.47,-680.53 900,-655 900,-590 P2.12
  Bottom Layer w10: v1(116.5,-710) v1(475,-710) ; v1(116.5,-290) v1(475,-290) ; v1(116.5,130) v1(475,130) ; v1(116.5,550) v1(475,550)
VCC: C1.A.1 C1.B.1 C1.C.1 C1.D.1 C2.A.1 C2.B.1 C2.C.1 C2.D.1 P2.1 P2.3 R1.A.2 R1.B.2 R1.C.2 R1.D.2 R2.A.2 R2.B.2 R2.C.2 R2.D.2 R12.2 R13.2 R14.2 R15.2 U1.A.8 U1.B.8 U1.C.8 U1.D.8 U2.A.8 U2.B.8 U2.C.8 U2.D.8 | length 6675.8
  Top Layer w10: R15.2 R14.2 ; R12.2 R13.2 R14.2 ; U2.D.8 -108.5,-610 -125.51,-592.99 C2.D.1 -93.5,-535 -63.5,-505 v1(-50,-505) ; U2.B.8 -108.5,-190 -125.51,-172.99 C2.B.1 -93.5,-115 -63.5,-85 v1(-50,-85) ; U2.C.8 -108.5,230 -125.51,247.01 C2.C.1 -93.5,305 -63.5,335 v1(-50,335) ; U2.A.8 -108.5,650 -125.51,667.01 C2.A.1 -93.5,725 -63.5,755 v1(-50,755) ; v1(0,0) -150,0 -175,-25 R14.2 ; R1.D.2 C1.D.1 ; R1.B.2 C1.B.1 ; R1.C.2 C1.C.1 ; R1.A.2 C1.A.1 ; v1(241.5,-510) 216.5,-535 C1.D.1 ; v1(241.5,-90) 216.5,-115 C1.B.1 ; v1(241.5,330) 216.5,305 C1.C.1 ; v1(241.5,750) 216.5,725 C1.A.1 ; R2.D.2 298.5,-610 U1.D.8 191.5,-610 181.5,-600 C1.D.1 ; R2.B.2 298.5,-190 U1.B.8 191.5,-190 181.5,-180 C1.B.1 ; R2.C.2 298.5,230 U1.C.8 191.5,230 181.5,240 C1.C.1 ; R2.A.2 298.5,650 U1.A.8 191.5,650 181.5,660 C1.A.1 ; P2.3 P2.1
  Bottom Layer w10: v1(-50,-505) -50,-475 -25,-450 0,-450 ; v1(-50,-85) -50,-55 -25,-30 0,-30 ; v1(-50,335) -50,365 -25,390 0,390 ; v1(-50,755) -50,785 -25,810 0,810 ; v1(241.5,-510) 241.5,-476.5 215,-450 0,-450 ; v1(241.5,330) 241.5,363.5 215,390 0,390 ; v1(241.5,750) 241.5,783.5 215,810 0,810 ; P2.3 580,-140 530,-90 v1(241.5,-90) 241.5,-56.5 215,-30 0,-30 ; 0,-450 0,-30 ; 0,-30 v1(0,0) 0,390 ; 0,390 0,810
VCCOUT: C10.1 C11.1 C12.1 C13.1 P2.2 R16.2 U3.8 U4.8 | length 1614.9
  Top Layer w10: v1(785,425) C13.1 C12.1 750,305 760,295 U4.8 885,295 900,280 R16.2 ; v1(785,780) C11.1 C10.1 750,665 760,655 U3.8
  Bottom Layer w10: v1(785,780) v1(785,425) 960,425 977.81,407.19 977.81,-12.19 P2.2
Vref_ChA: C3.A.1 C4.A.1 R2.A.1 R3.A.2 TP1.A.0 U2.A.3 U2.A.5 | length 908.6
  Top Layer w10: U2.A.3 v1(-188.5,550) -138.5,500 U2.A.5 -13.5,500 11.5,525 291.5,525 311.5,505 C3.A.1 ; C4.A.1 C3.A.1 ; R2.A.1 388.5,615 R3.A.2 C3.A.1
  Bottom Layer w10: v1(-188.5,550) TP1.A.0
Vref_ChB: C3.B.1 C4.B.1 R2.B.1 R3.B.2 TP1.B.0 U2.B.3 U2.B.5 | length 908.6
  Top Layer w10: U2.B.3 v1(-188.5,-290) -138.5,-340 U2.B.5 -13.5,-340 11.5,-315 291.5,-315 311.5,-335 C3.B.1 ; C4.B.1 C3.B.1 ; R2.B.1 388.5,-225 R3.B.2 C3.B.1
  Bottom Layer w10: v1(-188.5,-290) TP1.B.0
Vref_ChC: C3.C.1 C4.C.1 R2.C.1 R3.C.2 TP1.C.0 U2.C.3 U2.C.5 | length 908.6
  Top Layer w10: U2.C.3 v1(-188.5,130) -138.5,80 U2.C.5 -13.5,80 11.5,105 291.5,105 311.5,85 C3.C.1 ; C4.C.1 C3.C.1 ; R2.C.1 388.5,195 R3.C.2 C3.C.1
  Bottom Layer w10: v1(-188.5,130) TP1.C.0
Vref_ChD: C3.D.1 C4.D.1 R2.D.1 R3.D.2 TP1.D.0 U2.D.3 U2.D.5 | length 908.6
  Top Layer w10: U2.D.3 v1(-188.5,-710) -138.5,-760 U2.D.5 -13.5,-760 11.5,-735 291.5,-735 311.5,-755 C3.D.1 ; C4.D.1 C3.D.1 ; R2.D.1 388.5,-645 R3.D.2 C3.D.1
  Bottom Layer w10: v1(-188.5,-710) TP1.D.0
VrefOut: C8.1 C9.1 R16.1 R19.2 TP7.0 U3.3 U3.5 U4.3 U4.5 | length 1244.8
  Top Layer w10: U4.3 685,195 715,165 ; U3.3 690,555 717.5,527.5 ; C9.1 C8.1 R19.2 682.99,132.99 715,165 ; U3.5 740,505 717.5,527.5 ; v1(865,95) 865,145 ; R16.1 865,145 ; 715,165 717.5,162.5 ; 717.5,162.5 735,145 U4.5 865,145 ; 717.5,162.5 717.5,527.5
  Bottom Layer w10: v1(865,95) 929.45,30.55 TP7.0
W0_ChA: U1.A.6 U2.A.6 | length 325.7
  Top Layer w10: U2.A.6 -13.5,550 11.5,575 126.5,575 151.5,550 U1.A.6
W0_ChB: U1.B.6 U2.B.6 | length 325.7
  Top Layer w10: U2.B.6 -13.5,-290 11.5,-265 126.5,-265 151.5,-290 U1.B.6
W0_ChC: U1.C.6 U2.C.6 | length 325.7
  Top Layer w10: U2.C.6 -13.5,130 11.5,155 126.5,155 151.5,130 U1.C.6
W0_ChD: U1.D.6 U2.D.6 | length 325.7
  Top Layer w10: U2.D.6 -13.5,-710 11.5,-685 126.5,-685 151.5,-710 U1.D.6

## Polygon pours and split planes (outlines as drawn)
GND on Top Layer "TOP-GND" (hatched 45Degree grid 20 track 8, pour order 0): -1350,-545 -1350,555 -600,555 -600,845 1020,845 1020,-865 -600,-865 -600,-545
GND on Bottom Layer "BTM-GND" (solid, pour order 2): -1350,-545 -1350,555 -600,555 -600,845 1020,845 1020,-865 -600,-865 -600,-545

## Silkscreen, mask and mechanical layers (free items; w line width, h text height)
Board:
  lines w10: -1350,-545 -965,-545 -600,-545 -600,-865 378.75,-865 1020,-865 1020,845 413.75,845 -600,845 -600,555 -1350,555 -1350,-545

## Dimensions
-1350,-545 to -1350,555 on Mechanical 15
1020,-865 to 1020,845 on Mechanical 15
-1350,-545 to 1020,-865 on Mechanical 15
-600,-545 to 1020,-865 on Mechanical 15

## Text inside footprints (layer, text, board x,y; h text height)
P2: Top Overlay "16" at 930,-800 h50 r270; Top Overlay "15" at 830,-800 h50 r270; Top Overlay "1" at 830,60 h50 r270; Top Overlay "2" at 930,60 h50 r270